# EAGLE board Powerboard 72V (EAGLE 5.04)
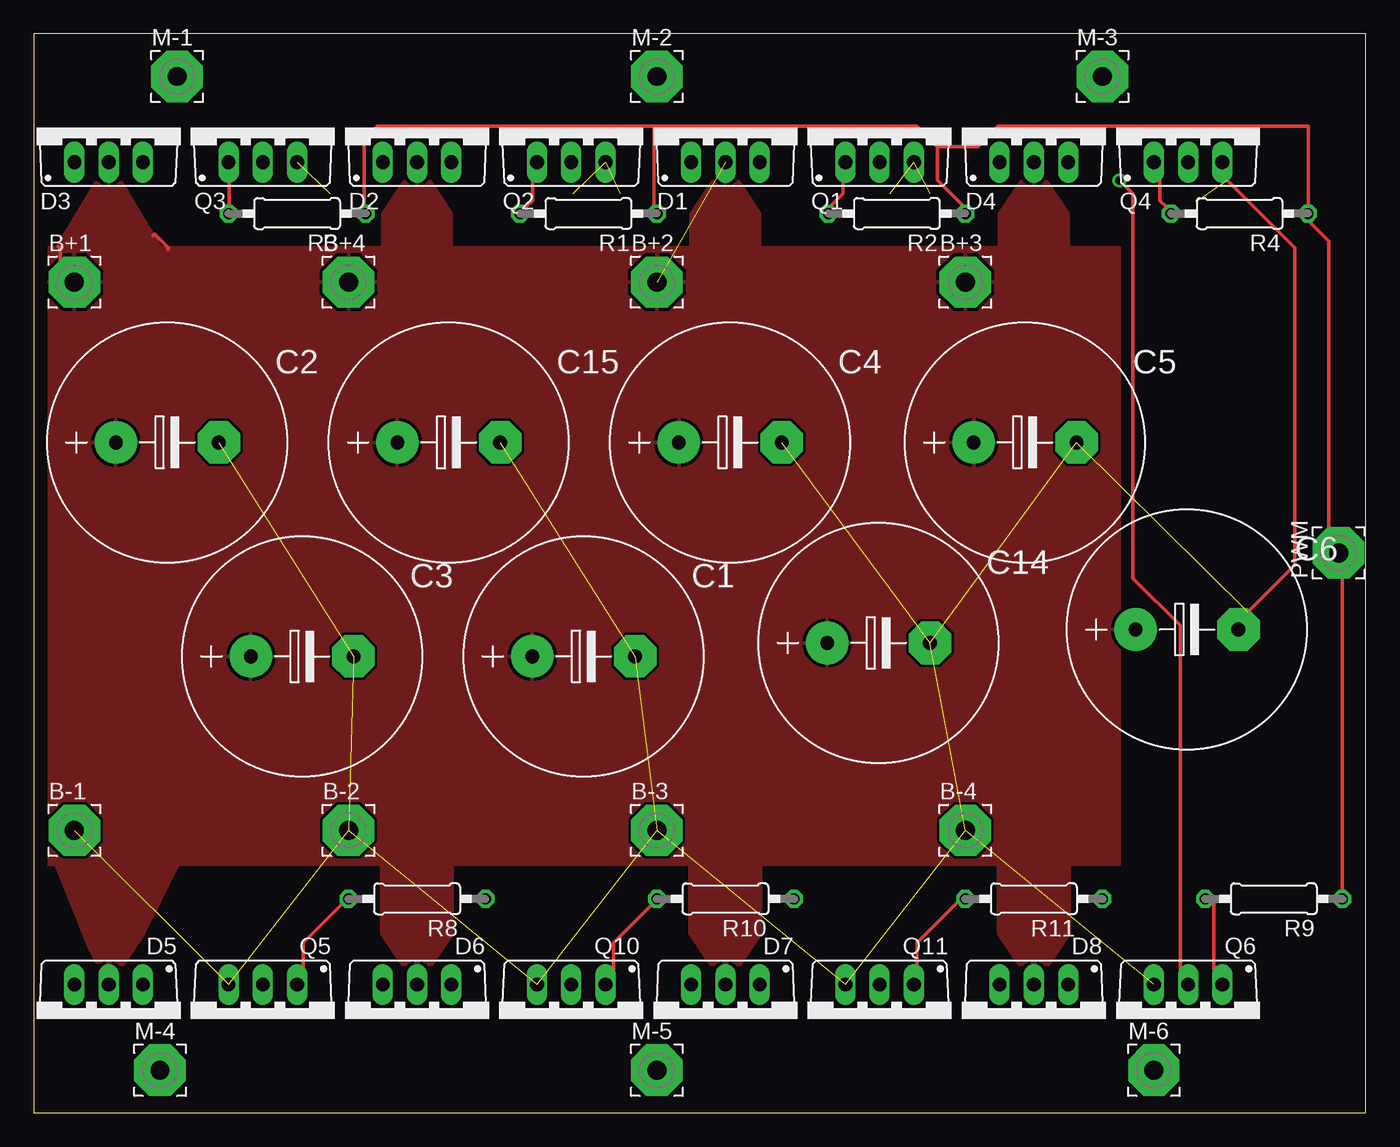
[diagram p0: board, top side]
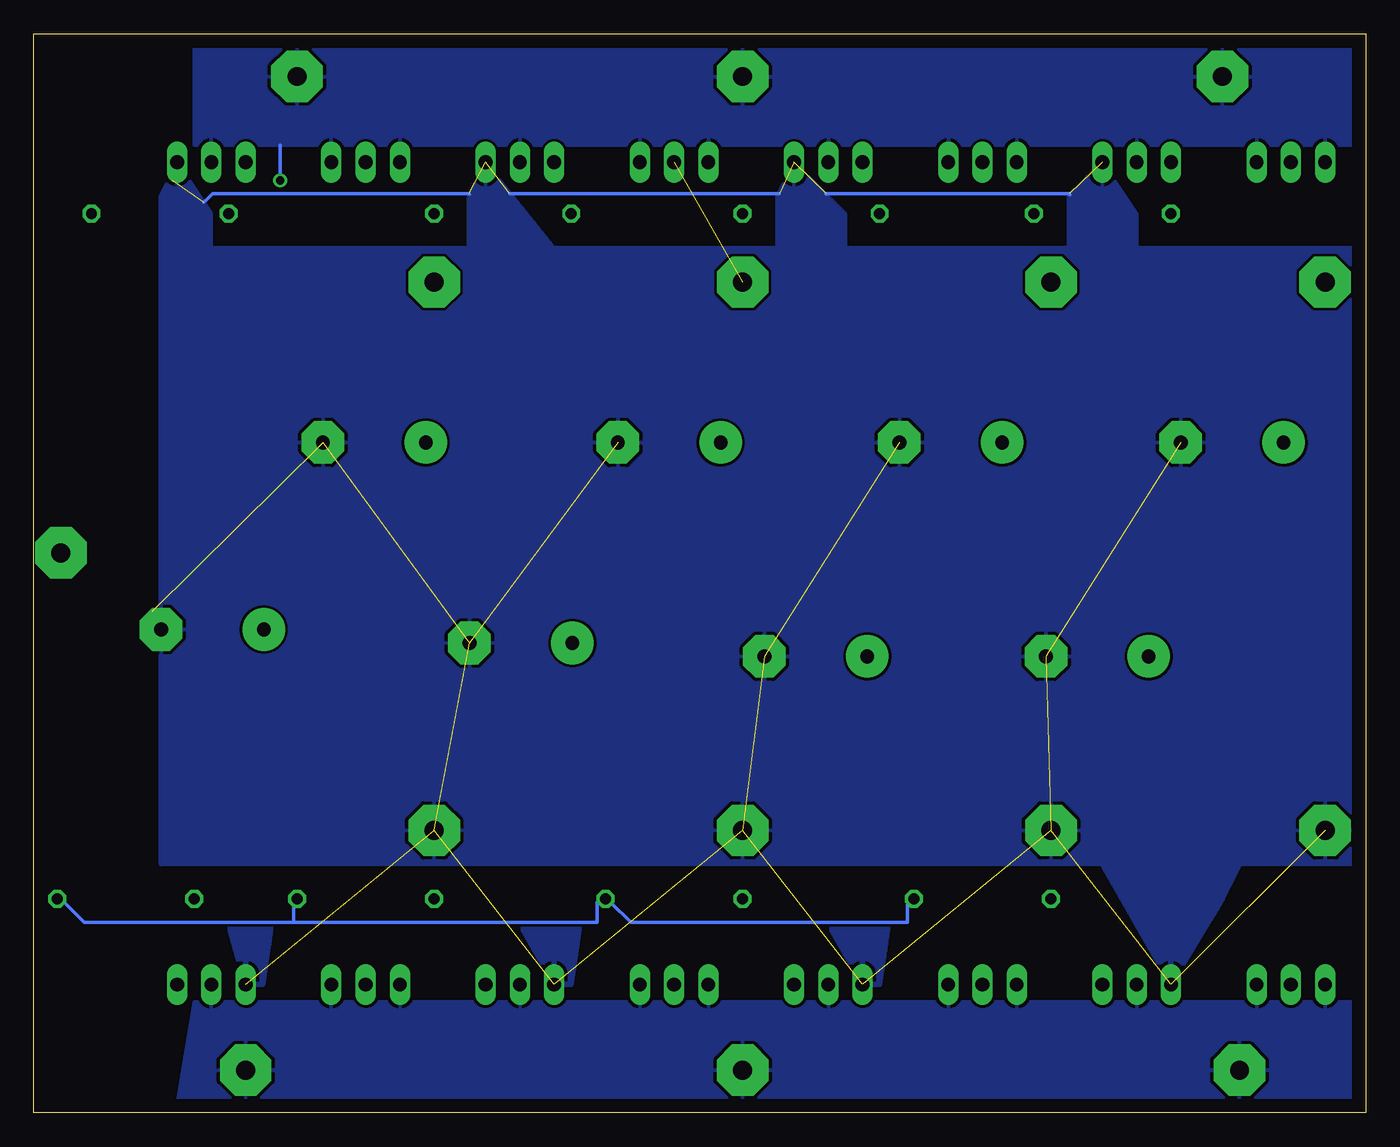
[diagram p1: board, bottom side, seen from below]

Size 98.73 x 80 mm. Coordinates in mm from the lower left corner, seen from the top.
Outline: 0,0 98.73,0 98.73,80 0,80 0,0
Copper layers (1*16): Top 0.035mm / dielectric 1.5mm / Bottom 0.035mm
Design rules "default": minimum track width 10mil, minimum drill 24mil, track to track 8mil, track to pad 0.5mm, pad to pad 1mm, via to via 1mm, smd to smd 8mil, copper to edge 40mil, drill to drill 8mil, minimum pad ring 10mil, minimum via ring 8mil, stop-mask expansion 2mm, vias tented up to drill 0mil, thermal gap 10mil

## Footprints (pad centres in the part's own frame; a part is rotated, then mirrored left to right if it is on the bottom)
3,81/1,4 = drill 1.397 pad 3.81 octagon: 1 0,0
E7,5-18 = drill 1.016 pad 3.15 round: + -3.81,0 | drill 1.016 pad 3.15 octagon: - 3.81,0
TO220ABS = drill 1.016 long: A1 -2.54,-2.54; A2 2.54,-2.54; C 0,-2.54
TO220BV = drill 1.016 long: D 0,-2.54; G -2.54,-2.54; S 2.54,-2.54
0207/10 = drill 0.813 octagon: 1 -5.08,0; 2 5.08,0

## Placement (x,y rotation side)
B+1  [3,81/1,4]  3.01,61.59 0 top
B+2  [3,81/1,4]  46.19,61.59 0 top
B+3  [3,81/1,4]  69.05,61.59 0 top
B+4  [3,81/1,4]  23.33,61.59 0 top
B-1  [3,81/1,4]  3.01,20.95 0 top
B-2  [3,81/1,4]  23.33,20.95 0 top
B-3  [3,81/1,4]  46.19,20.95 0 top
B-4  [3,81/1,4]  69.05,20.95 0 top
C1  560u  [E7,5-18]  40.76,33.84 0 top
C2  560u  [E7,5-18]  9.9,49.7 0 top
C3  560u  [E7,5-18]  19.9,33.84 0 top
C4  560u  [E7,5-18]  51.62,49.7 0 top
C5  560u  [E7,5-18]  73.48,49.7 0 top
C6  560u  [E7,5-18]  85.48,35.84 0 top
C14  560u  [E7,5-18]  62.62,34.84 0 top
C15  560u  [E7,5-18]  30.76,49.7 0 top
D1  BYV32  [TO220ABS]  51.27,73.02 0 top
D2  BYV32  [TO220ABS]  28.41,73.02 0 top
D3  BYV32  [TO220ABS]  5.55,73.02 0 top
D4  BYV32  [TO220ABS]  74.13,73.02 0 top
D5  BYV32  [TO220ABS]  5.55,6.98 180 top
D6  BYV32  [TO220ABS]  28.41,6.98 180 top
D7  BYV32  [TO220ABS]  51.27,6.98 180 top
D8  BYV32  [TO220ABS]  74.13,6.98 180 top
M-1  [3,81/1,4]  10.63,76.83 0 top
M-2  [3,81/1,4]  46.19,76.83 0 top
M-3  [3,81/1,4]  79.21,76.83 0 top
M-4  [3,81/1,4]  9.36,3.17 0 top
M-5  [3,81/1,4]  46.19,3.17 0 top
M-6  [3,81/1,4]  83.02,3.17 0 top
PWM  [3,81/1,4]  96.72,41.52 90 top
Q1  IRF540  [TO220BV]  62.7,73.02 0 top
Q2  IRF540  [TO220BV]  39.84,73.02 0 top
Q3  IRF540  [TO220BV]  16.98,73.02 0 top
Q4  IRF540  [TO220BV]  85.56,73.02 0 top
Q5  IRF540  [TO220BV]  16.98,6.98 180 top
Q6  IRF540  [TO220BV]  85.56,6.98 180 top
Q10  IRF540  [TO220BV]  39.84,6.98 180 top
Q11  IRF540  [TO220BV]  62.7,6.98 180 top
R1  100  [0207/10]  41.11,66.67 180 top
R2  100  [0207/10]  63.97,66.67 180 top
R3  100  [0207/10]  19.52,66.67 180 top
R4  100  [0207/10]  89.37,66.67 180 top
R8  100  [0207/10]  28.41,15.87 180 top
R9  100  [0207/10]  91.91,15.87 180 top
R10  100  [0207/10]  51.27,15.87 180 top
R11  100  [0207/10]  74.13,15.87 180 top

## Library data of the parts
B+1-B+4 B-1-B-4 M-1-M-6 PWM = wirepad
C1-C6 C14 C15 R1-R4 R8-R11 = rcl
D1-D8 = diode
Q1-Q6 Q10 Q11 = transistor-power

## Nets
M-: D1.A1 D1.A2 D2.A1 D2.A2 D3.A1 D3.A2 D4.A1 D4.A2 D5.A1 D5.A2 D6.A1 D6.A2 D7.A1 D7.A2 D8.A1 D8.A2 M-1.1 M-2.1 M-3.1 M-4.1 M-5.1 M-6.1 Q1.D Q2.D Q3.D Q4.D Q5.D Q6.D Q10.D Q11.D
N$1: Q10.G R10.2
N$4: Q5.G R8.2
N$5: Q6.G R9.2
N$7: Q2.G R1.2
N$8: Q1.G R2.2
N$9: Q3.G R3.2
N$10: Q4.G R4.2
N$11: PWM.1 R1.1 R2.1 R3.1 R4.1 R8.1 R9.1 R10.1 R11.1
N$18: Q11.G R11.2
V+: B+1.1 B+2.1 B+3.1 B+4.1 C1.+ C2.+ C3.+ C4.+ C5.+ C6.+ C14.+ C15.+ D1.C D2.C D3.C D4.C D5.C D6.C D7.C D8.C
V-: B-1.1 B-2.1 B-3.1 B-4.1 C1.- C2.- C3.- C4.- C5.- C6.- C14.- C15.- Q1.S Q2.S Q3.S Q4.S Q5.S Q6.S Q10.S Q11.S

## Tracks (layer width: path | path; a pad name or v marks a point on that pad's centre or on a via)
M-  (via drill 0.61)
  Top 0.254: v80.47,69.13 81.47,68.13 81.47,39.63 84.97,36.13 84.97,10.63 Q6.D
  Bottom 0.254: v80.47,69.13 80.47,71.75
  pour Bottom: 0.47,0.63 0.47,8.25 86.83,8.25 88.1,0.63
  pour Bottom: 0.47,71.75 86.83,71.75 86.83,79.37 0.47,79.37
N$1
  Top 0.254: R10.2 45.97,15.63 42.97,12.63 42.97,10.63 Q10.G
N$4
  Top 0.254: R8.2 22.97,15.63 19.97,12.63 19.97,10.63 Q5.G
N$5
  Top 0.254: R9.2 87.47,15.63 87.47,10.63 Q6.G
N$7
  Top 0.254: R1.2 36.47,67.13 36.97,67.63 36.97,69.13 Q2.G
N$8
  Top 0.254: R2.2 58.97,67.13 59.97,68.13 59.97,69.13 Q1.G
N$9
  Top 0.254: R3.2 14.47,67.13 14.47,69.13 Q3.G
N$10
  Top 0.254: R4.2 83.97,67.13 83.47,67.63 83.47,69.13 Q4.G
N$11
  Top 0.254: 45.97,73.13 25.47,73.13 24.47,72.13 24.47,67.13 R3.1 | 45.97,73.13 45.97,67.13 R1.1 | 66.97,71.63 66.97,69.13 68.97,67.13 R2.1 | 66.97,71.63 65.47,73.13 45.97,73.13 | R9.1 96.97,16.13 96.97,39.63 PWM.1 95.97,43.13 95.97,64.63 94.47,66.13 R4.1 94.47,67.13 94.47,73.13 71.47,73.13 69.97,71.63 66.97,71.63
  Bottom 0.254: R8.1 33.97,15.63 33.97,14.13 54.47,14.13 55.97,15.63 R10.1 56.97,15.63 56.97,14.13 79.47,14.13 | 79.47,14.13 79.47,15.63 R11.1 | 79.47,14.13 94.97,14.13 96.47,15.63 R9.1
N$18
  Top 0.254: R11.2 68.47,15.63 65.47,12.63 65.47,10.63 Q11.G
V+  (1 unrouted)
  Top 0.254: 1.8,64.23 1.97,64.13 1.97,63.13 B+1.1 | 8.82,65.04 8.97,65.13 9.97,64.13 9.93,63.99
  pour Top: 0.47,64.13 0.47,18.41 80.48,18.41 80.48,64.13
  pour Top: 8.09,13.33 10.63,18.41 1.74,18.41 4.28,12.06 5.55,9.52
  pour Top: 28.41,9.52 25.87,13.33 25.87,19.68 30.95,19.68 30.95,13.33
  pour Top: 51.27,9.52 48.73,13.33 48.73,18.41 50,19.68 53.81,19.68 53.81,13.33
  pour Top: 74.13,9.52 71.59,13.33 71.59,18.41 76.67,18.41 76.67,13.33
  pour Top: 5.55,70.48 1.74,64.13 9.36,64.13
  pour Top: 28.41,70.48 30.95,66.67 30.95,64.13 25.87,64.13 25.87,66.67
  pour Top: 51.27,70.48 48.73,66.67 48.73,62.86 53.81,62.86 53.81,66.67
  pour Top: 74.13,70.48 71.59,66.67 71.59,64.13 76.67,64.13 76.67,66.67
V-  (21 unrouted)
  Top 0.254: Q4.S 88.47,69.13 93.47,64.13 93.47,40.63 89.97,37.13 C6.-
  Bottom 0.254: 21.92,68.08 21.97,68.13 39.97,68.13 40,68.1 | 86.13,67.52 85.97,67.63 85.47,68.13 66.47,68.13 66.43,68.11 | 43.47,68.13 63.47,68.13
  pour Bottom: 0.47,64.13 0.47,18.41 89.37,18.41 89.37,64.13
  pour Bottom: 14.44,9.52 10.63,15.87 9.36,18.41 19.52,18.41
  pour Bottom: 37.3,9.52 36.03,9.52 34.76,18.41 39.84,18.41 41.11,18.41 42.38,18.41
  pour Bottom: 60.16,9.52 58.89,9.52 57.62,18.41 63.97,18.41 65.24,18.41
  pour Bottom: 83.02,9.52 81.75,9.52 80.48,18.41 85.56,18.41
  pour Bottom: 19.52,70.48 16.98,66.67 16.98,64.13 22.06,64.13 22.06,67.94
  pour Bottom: 42.38,70.48 38.57,66.67 38.57,64.13 43.65,64.13 43.65,67.94
  pour Bottom: 65.24,70.48 60.16,64.13 66.51,64.13 66.51,67.94
  pour Bottom: 88.1,70.48 89.37,67.94 89.37,64.13 86.83,64.13 85.56,64.13 85.56,66.67